# Altium PCB Detection_Circuit_PCB.PcbDoc
Units mil, origin at the board's own origin, x right, y up, seen from the top; angles counter-clockwise.
Board outline 6000 x 2000 mil, 2 copper layers (TOP, BOTTOM), stack 54 mil thick; 173 components, 63 nets, 342 pads, 41 vias.
Unrouted connection lines stored in the file: 3.
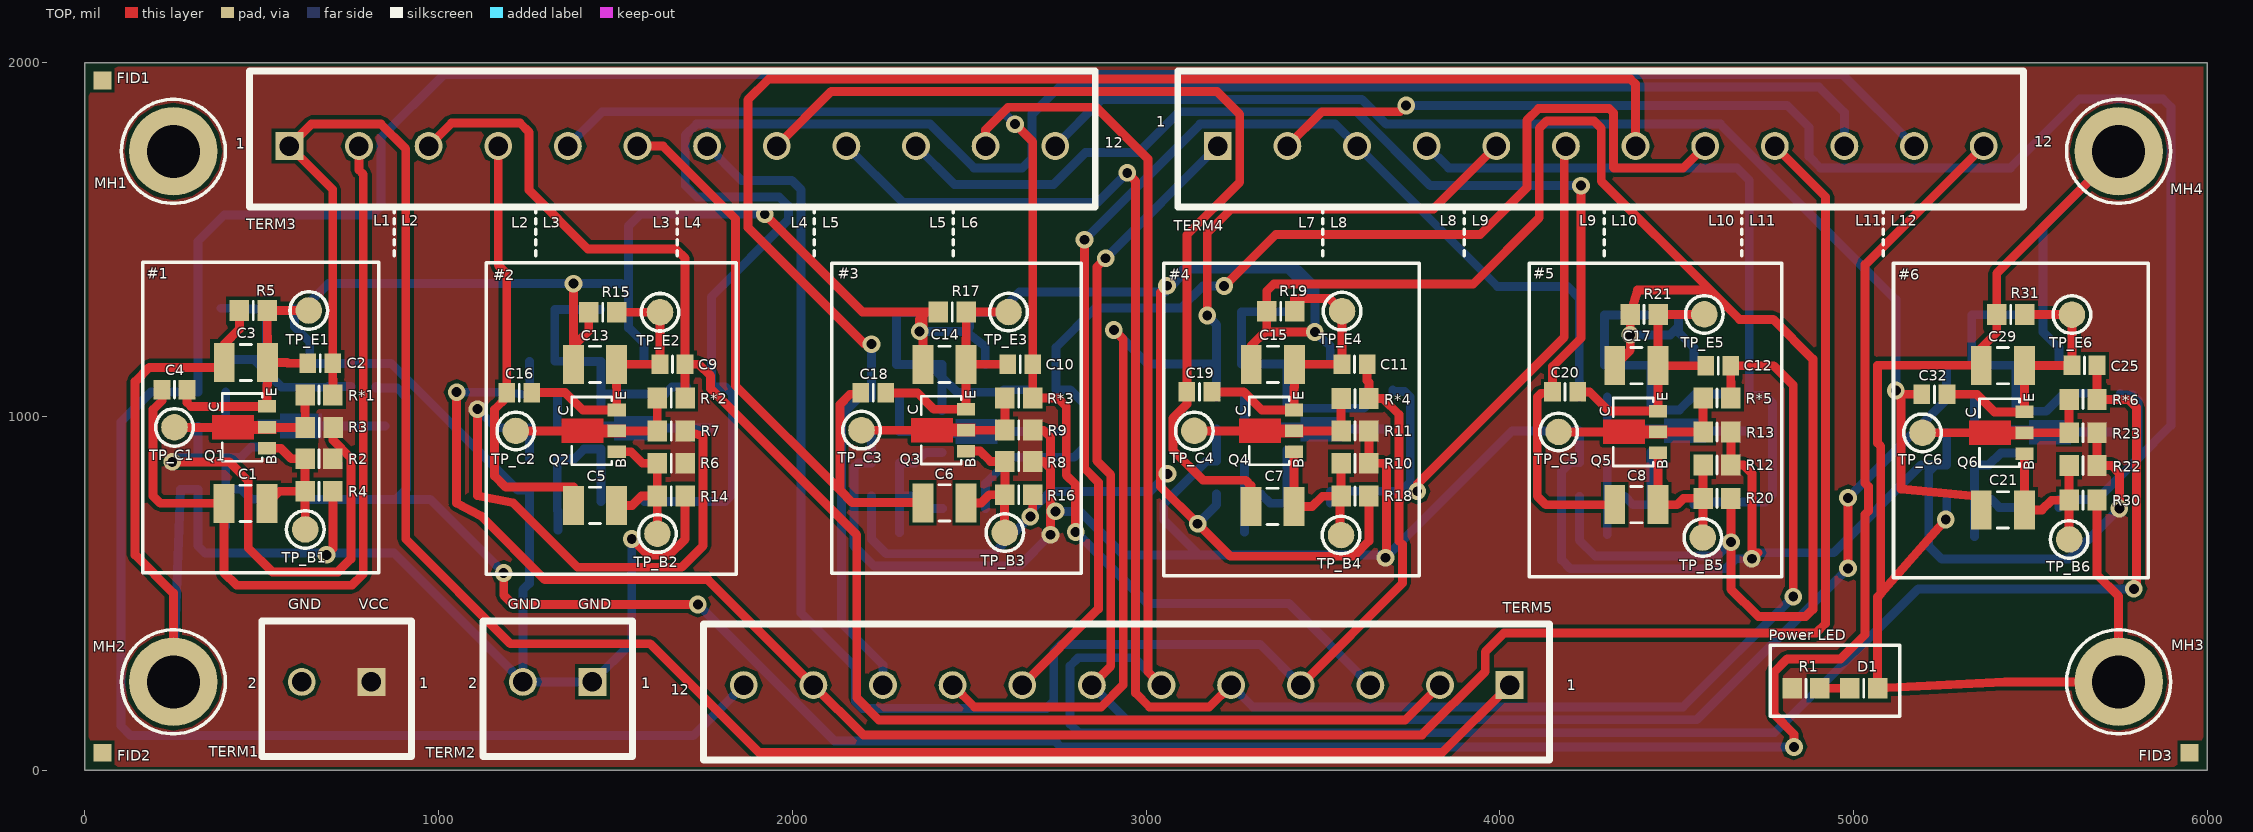
[diagram p0: TOP view]
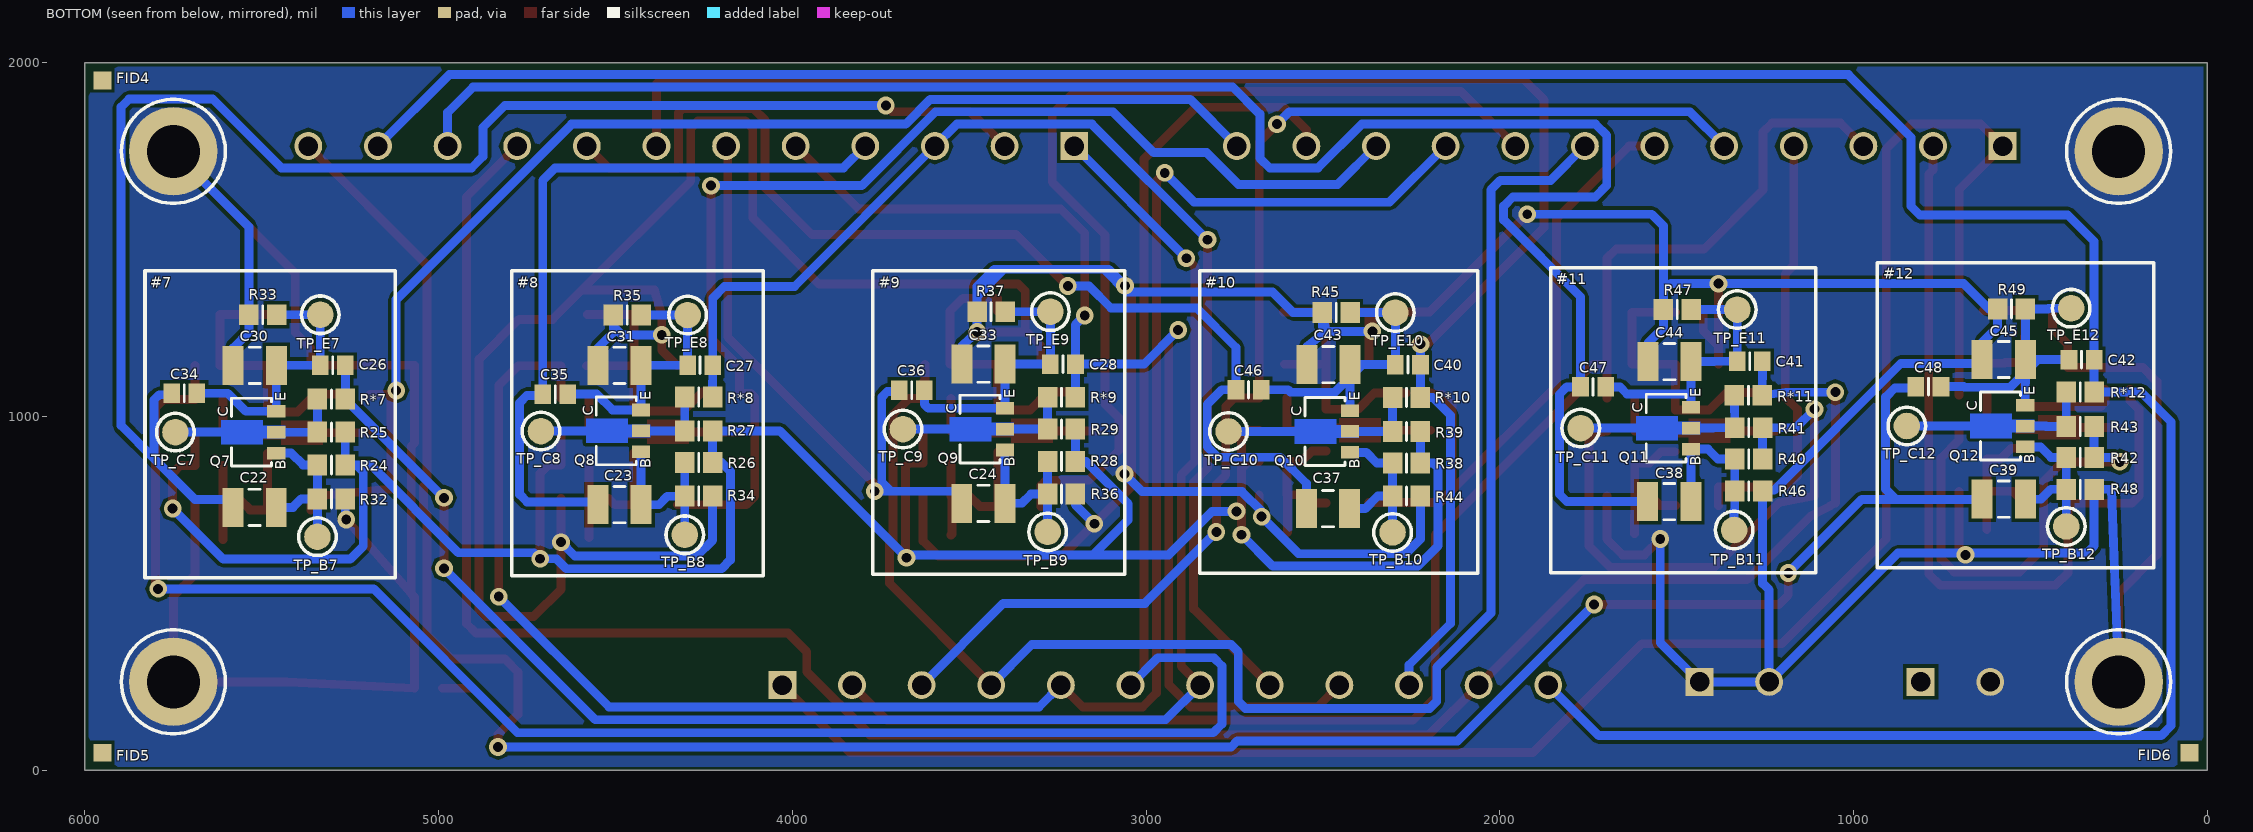
[diagram p1: BOTTOM view, seen from below]

## Layer stack, top to bottom
Top Solder: solder mask 4, Solder Resist, Dk 3.5
TOP: signal copper 20
Dielectric 1: dielectric 14, FR-4, Dk 4.8
BOTTOM: signal copper 20
Bottom Solder: solder mask 4, Solder Resist, Dk 3.5

## Board outline
0,0 6000,0 6000,2000 0,2000

## Design rules (kind name [scope] priority, off if disabled: settings)
BoardOutlineClearance [All] p1: gap=10
Clearance [All] p1: gap=10
HoleSize [All] p1: absolutevalues=TRUE maxlimit=500 minlimit=1 maxpercent=80.000 minpercent=20.000
MinimumSolderMaskSliver [All] p1: minsoldermaskwidth=5
PlaneConnect [All] p1: planeconnectstyle=Direct reliefexpansion=20 reliefentries=4 reliefconductorwidth=10 reliefairgap=10
PolygonConnect [All] p1: connectstyle=Direct reliefconductorwidth=10 reliefentries=4 polygonreliefangle="90 Angle" airgapwidth=10
RoutingVias VCC_Vias [InNet('VCC')] p1: holewidth=28 width=50 viastyle="Through Hole" minholewidth=28 minwidth=50 maxholewidth=28 maxwidth=50
RoutingVias GND_Vias [InNet('GND')] p2: holewidth=28 width=50 viastyle="Through Hole" minholewidth=28 minwidth=50 maxholewidth=28 maxwidth=50
RoutingVias Default_Vias [InNetClass('Default_Class')] p3: holewidth=28 width=50 viastyle="Through Hole" minholewidth=28 minwidth=50 maxholewidth=28 maxwidth=50
SilkToSilkClearance [All] p1: silktosilkclearance=5
SilkToSolderMaskClearance [IsPad] p1: minsilkscreentomaskgap=5 clearancetoexposedcopper=TRUE
SolderMaskExpansion [All] p1: expansion=4
Width VCC_Width [InNet('VCC')] p1: maxlimit=25 minlimit=25 preferedwidth=25
Width GND_Width [InNet('GND')] p2: maxlimit=25 minlimit=25 preferedwidth=25
Width Default_Width [InNetClass('Default_Class')] p3: maxlimit=25 minlimit=25 preferedwidth=25
25 further rules are at their usual default settings.

## Classes and differential pairs
net class Default_Class: BASE_1 BASE_2 BASE_3 BASE_4 BASE_5 BASE_6 BASE_7 BASE_8 BASE_9 BASE_10 BASE_11 BASE_12 COLLECTOR_1 COLLECTOR_2 COLLECTOR_3 COLLECTOR_4 COLLECTOR_5 COLLECTOR_6 COLLECTOR_7 COLLECTOR_8 COLLECTOR_9 COLLECTOR_10 COLLECTOR_11 COLLECTOR_12 EMITTER_1 EMITTER_2 EMITTER_3 EMITTER_4 EMITTER_5 EMITTER_6 EMITTER_7 EMITTER_8 EMITTER_9 EMITTER_10 EMITTER_11 EMITTER_12 FEEDBACK_1 FEEDBACK_2 FEEDBACK_3 FEEDBACK_4 FEEDBACK_5 FEEDBACK_6 FEEDBACK_7 FEEDBACK_8 FEEDBACK_9 FEEDBACK_10 FEEDBACK_11 FEEDBACK_12 MCU_1 MCU_2 MCU_3 MCU_4 MCU_5 MCU_6 MCU_7 MCU_8 MCU_9 MCU_10 MCU_11 MCU_12 NetD1_1
component class Detection_Circuit_Sheet_02: C5 C6 C7 C8 C9 C10 C11 C12 C13 C14 C15 C16 C17 C18 C19 C20 C21 C22 C23 C24 C25 C26 C27 C28 C29 C30 C31 C32 C33 C34 C35 C36 C37 C38 C39 C40 C41 C42 C43 C44 C45 C46 C47 C48 Q2 Q3 Q4 Q5 Q6 Q7 Q8 Q9 Q10 Q11 Q12 R6 R7 R8 R9 R10 R11 R12 R13 R14 R15 R16 R17 R18 R19 R20 R21 R22 R23 R24 R25 R26 R27 R28 R29 R30 R31 R32 R33 R34 R35 R36 R37 R38 R39 R40 R41 R42 R43 R44 R45 R46 R47 R48 R49 R*2 R*3 R*4 R*5 R*6 R*7 R*8 R*9 R*10 R*11 R*12 TERM3 TERM4 TERM5 TP_B2 TP_B3 TP_B4 TP_B5 TP_B6 TP_B7 TP_B8 TP_B9 TP_B10 TP_B11 TP_B12 TP_C2 TP_C3 TP_C4 TP_C5 TP_C6 TP_C7 TP_C8 TP_C9 TP_C10 TP_C11 TP_C12 TP_E2 TP_E3 TP_E4 TP_E5 TP_E6 TP_E7 TP_E8 TP_E9 TP_E10 TP_E11 TP_E12
component class Detection_Circuit_Sheet_01: C1 C2 C3 C4 D1 FID1 FID2 FID3 FID4 FID5 FID6 HEX_NUT1 MH1 MH2 MH3 MH4 Q1 R1 R2 R3 R4 R5 R*1 Screw1 StandOff1 StandOff2 StandOff3 StandOff4 TERM1 TERM2 TP_B1 TP_C1 TP_E1 Washer1 Washer2 Washer3 Washer4 Washer5 Washer6 Washer7 Washer8

## Components (designator, comment, footprint, x,y, rotation, side; value= is the part's Value field where it differs from the comment)
C1 "100UF" C1210_M 454,755 r0 top
C2 "08055C224JAT2A" 6-0805_N 665.34,1151 r0 top
C3 "100UF" C1210_M 455,1153 r0 top
C4 "08055C224JAT2A" 6-0805_N 253.28,1076.59 r0 top
C5 "100UF" C1210_M 1442.37,749 r0 top
C6 "100UF" C1210_M 2430.39,756 r0 top
C7 "100UF" C1210_M 3357.74,746 r0 top
C8 "100UF" C1210_M 4386.37,751 r0 top
C9 "08055C224JAT2A" 6-0805_N 1661.37,1148 r0 top
C10 "08055C224JAT2A" 6-0805_N 2644.39,1148 r0 top
C11 "08055C224JAT2A" 6-0805_N 3589.74,1148 r0 top
C12 "08055C224JAT2A" 6-0805_N 4617.8,1144 r0 top
C13 "100UF" C1210_M 1442.37,1148 r0 top
C14 "100UF" C1210_M 2430.39,1148 r0 top
C15 "100UF" C1210_M 3358.74,1148 r0 top
C16 "08055C224JAT2A" 6-0805_N 1228,1068 r0 top
C17 "100UF" C1210_M 4386.37,1144 r0 top
C18 "08055C224JAT2A" 6-0805_N 2229,1067 r0 top
C19 "08055C224JAT2A" 6-0805_N 3151,1070 r0 top
C20 "08055C224JAT2A" 6-0805_N 4185,1070 r0 top
C21 "100UF" C1210_M 5422.65,736.28 r0 top
C22 "100UF" C1210_M 5520.11,743.4 r180 bottom
C23 "100UF" C1210_M 4488.57,751 r180 bottom
C24 "100UF" C1210_M 3460,755 r180 bottom
C25 "08055C224JAT2A" 6-0805_N 5653.37,1144.69 r0 top
C26 "08055C224JAT2A" 6-0805_N 5299.11,1145 r180 bottom
C27 "08055C224JAT2A" 6-0805_N 4260.57,1145.38 r180 bottom
C28 "08055C224JAT2A" 6-0805_N 3235,1148.6 r180 bottom
C29 "100UF" C1210_M 5422.65,1144.28 r0 top
C30 "100UF" C1210_M 5519.83,1145 r180 bottom
C31 "100UF" C1210_M 4488.57,1145 r180 bottom
C32 "08055C224JAT2A" 6-0805_N 5229,1063 r0 top
C33 "100UF" C1210_M 3459.72,1148.6 r180 bottom
C34 "08055C224JAT2A" 6-0805_N 5719,1066 r180 bottom
C35 "08055C224JAT2A" 6-0805_N 4670.28,1063.6 r180 bottom
C36 "08055C224JAT2A" 6-0805_N 3662,1075 r180 bottom
C37 "100UF" C1210_M 2485.31,740 r180 bottom
C38 "100UF" C1210_M 1520.57,759.4 r180 bottom
C39 "100UF" C1210_M 574.88,766.4 r180 bottom
C40 "08055C224JAT2A" 6-0805_N 2259.6,1147 r180 bottom
C41 "08055C224JAT2A" 6-0805_N 1292.88,1156.4 r180 bottom
C42 "08055C224JAT2A" 6-0805_N 354.88,1161.4 r180 bottom
C43 "100UF" C1210_M 2484.31,1147 r180 bottom
C44 "100UF" C1210_M 1519.88,1155.4 r180 bottom
C45 "100UF" C1210_M 574.88,1161.4 r180 bottom
C46 "08055C224JAT2A" 6-0805_N 2710,1076 r180 bottom
C47 "08055C224JAT2A" 6-0805_N 1736,1084 r180 bottom
C48 "08055C224JAT2A" 6-0805_N 788,1085 r180 bottom
D1 "LTST-C171GKT" 6-0805_M 5029,232 r0 top
FID1 "Fiducial" Fiducial#1 52,1951 r90 top
FID2 "Fiducial" Fiducial#2 -246,158 r90 top
FID3 "Fiducial" Fiducial#3 5953,55 r90 top
FID4 "Fiducial" Fiducial#4 5948,1950 r90 bottom
FID5 "Fiducial" Fiducial#5 5969,99 r90 bottom
FID6 "Fiducial" Fiducial#6 -110,51 r90 bottom
MH1 "#6 MH" #6_MH 250,1750 r0 top locked
MH2 "#6 MH" #6_MH 250,250 r0 top locked
MH3 "#6 MH" #6_MH 5750,250 r0 top locked
MH4 "#6 MH" #6_MH 5750,1750 r0 top locked
Q1 "DXT3904" DXT3904-13 445.28,969.6 r90 top
Q2 "DXT3904" DXT3904-13 1433.65,959.6 r90 top
Q3 "DXT3904" DXT3904-13 2421.68,961.6 r90 top
Q4 "DXT3904" DXT3904-13 3349.02,959.6 r90 top
Q5 "DXT3904" DXT3904-13 4377.96,956.69 r90 top
Q6 "DXT3904" DXT3904-13 5413.65,954.28 r90 top
Q7 "DXT3904" DXT3904-13 5528.83,956 r90 bottom
Q8 "DXT3904" DXT3904-13 4497.28,959.6 r90 bottom
Q9 "DXT3904" DXT3904-13 3468.72,964.6 r90 bottom
Q10 "DXT3904" DXT3904-13 2493.31,958 r90 bottom
Q11 "DXT3904" DXT3904-13 1528.88,967.4 r90 bottom
Q12 "DXT3904" DXT3904-13 583.88,973.4 r90 bottom
R1 "1K" 6-0805_M 4866,232 r180 top
R2 "39K" 6-0805_M 662,881 r0 top
R3 "2.2K" 6-0805_M 662.28,969.54 r0 top
R4 "10K" 6-0805_M 662,789 r180 top
R5 "470" 6-0805_M 476,1300 r0 top
R6 "39K" 6-0805_M 1657.65,868 r0 top
R7 "2.2K" 6-0805_M 1657.65,959.54 r0 top
R8 "39K" 6-0805_M 2640.39,873 r0 top
R9 "2.2K" 6-0805_M 2640.39,961.6 r0 top
R10 "39K" 6-0805_M 3590.74,868 r0 top
R11 "2.2K" 6-0805_M 3590.74,959.6 r0 top
R12 "39K" 6-0805_M 4614.37,863 r0 top
R13 "2.2K" 6-0805_M 4614.37,956.64 r0 top
R14 "10K" 6-0805_M 1657.65,776 r180 top
R15 "470" 6-0805_M 1464.02,1295 r0 top
R16 "10K" 6-0805_M 2640.39,779 r180 top
R17 "470" 6-0805_M 2452.39,1296 r0 top
R18 "10K" 6-0805_M 3590.74,775 r180 top
R19 "470" 6-0805_M 3380.72,1298 r0 top
R20 "10K" 6-0805_M 4614.37,769 r180 top
R21 "470" 6-0805_M 4408.37,1289 r0 top
R22 "39K" 6-0805_M 5649.37,861.69 r0 top
R23 "2.2K" 6-0805_M 5649.37,954.23 r0 top
R24 "39K" 6-0805_M 5303.11,863.4 r180 bottom
R25 "2.2K" 6-0805_M 5303.11,955.94 r180 bottom
R26 "39K" 6-0805_M 4264.57,870 r180 bottom
R27 "2.2K" 6-0805_M 4264.57,959.54 r180 bottom
R28 "39K" 6-0805_M 3238.72,873.6 r180 bottom
R29 "2.2K" 6-0805_M 3238.72,964.54 r180 bottom
R30 "10K" 6-0805_M 5649.37,763.69 r180 top
R31 "470" 6-0805_M 5444.65,1288.28 r0 top
R32 "10K" 6-0805_M 5303.11,767.4 r0 bottom
R33 "470" 6-0805_M 5497.13,1288 r180 bottom
R34 "10K" 6-0805_M 4264.57,775 r0 bottom
R35 "470" 6-0805_M 4466.57,1287 r180 bottom
R36 "10K" 6-0805_M 3239,781 r0 bottom
R37 "470" 6-0805_M 3438,1296.6 r180 bottom
R38 "39K" 6-0805_M 2263.6,868.4 r180 bottom
R39 "2.2K" 6-0805_M 2263.6,958 r180 bottom
R40 "39K" 6-0805_M 1296,880 r180 bottom
R41 "2.2K" 6-0805_M 1295.88,968.4 r180 bottom
R42 "39K" 6-0805_M 358.88,884.4 r180 bottom
R43 "2.2K" 6-0805_M 358.88,972.5 r180 bottom
R44 "10K" 6-0805_M 2263.6,775.4 r0 bottom
R45 "470" 6-0805_M 2462.31,1294 r180 bottom
R46 "10K" 6-0805_M 1296,790 r0 bottom
R47 "470" 6-0805_M 1497.88,1302.4 r180 bottom
R48 "10K" 6-0805_M 358.88,794.4 r0 bottom
R49 "470" 6-0805_M 552.88,1304.59 r180 bottom
R*1 "0" 6-0805_M 662,1061 r0 top
R*2 "0" 6-0805_M 1657.65,1053 r0 top
R*3 "0" 6-0805_M 2640.39,1053 r0 top
R*4 "0" 6-0805_M 3590.74,1051 r0 top
R*5 "0" 6-0805_M 4614.37,1052.69 r0 top
R*6 "0" 6-0805_M 5649.37,1048.69 r0 top
R*7 "0" 6-0805_M 5303.11,1049.4 r180 bottom
R*8 "0" 6-0805_M 4264.57,1055 r180 bottom
R*9 "0" 6-0805_M 3238.72,1054.6 r180 bottom
R*10 "0" 6-0805_M 2263.6,1054.4 r180 bottom
R*11 "0" 6-0805_M 1296.88,1060.4 r180 bottom
R*12 "0" 6-0805_M 358.88,1069.4 r180 bottom
TERM1 "1935161" 1935161 810,250 r0 top
TERM2 "1935161" 1935161 1435,250 r0 top
TERM3 "1935268" 1935268 578,1765 r180 top locked
TERM4 "1935268" 1935268 3203,1765 r180 top locked
TERM5 "1935268" 1935268 4028,241 r0 top locked
TP_B1 "TestPoint" TestPoint 623,681 r90 top
TP_B2 "TestPoint" TestPoint 1618.68,669 r90 top
TP_B3 "TestPoint" TestPoint 2601.02,672 r90 top
TP_B4 "TestPoint" TestPoint 3551.37,665 r90 top
TP_B5 "TestPoint" TestPoint 4574.37,658 r90 top
TP_B6 "TestPoint" TestPoint 5610,652.69 r90 top
TP_B7 "TestPoint" TestPoint 5342.48,660.4 r90 bottom
TP_B8 "TestPoint" TestPoint 4303.94,666 r90 bottom
TP_B9 "TestPoint" TestPoint 3278.09,674 r90 bottom
TP_B10 "TestPoint" TestPoint 2302.88,672.4 r90 bottom
TP_B11 "TestPoint" TestPoint 1337.25,679.4 r90 bottom
TP_B12 "TestPoint" TestPoint 398.25,689.4 r90 bottom
TP_C1 "TestPoint" TestPoint 253.28,969.6 r90 top
TP_C2 "TestPoint" TestPoint 1218.37,959.54 r90 top
TP_C3 "TestPoint" TestPoint 2195.68,961.6 r90 top
TP_C4 "TestPoint" TestPoint 3136.74,959.6 r90 top
TP_C5 "TestPoint" TestPoint 4166.37,956.64 r90 top
TP_C6 "TestPoint" TestPoint 5195.37,954.23 r90 top
TP_C7 "TestPoint" TestPoint 5744.11,956 r90 bottom
TP_C8 "TestPoint" TestPoint 4710.57,959 r90 bottom
TP_C9 "TestPoint" TestPoint 3687,964.54 r90 bottom
TP_C10 "TestPoint" TestPoint 2766.6,958 r90 bottom
TP_C11 "TestPoint" TestPoint 1770.88,967.4 r90 bottom
TP_C12 "TestPoint" TestPoint 848.88,973.4 r90 bottom
TP_E1 "TestPoint" TestPoint 633,1300 r90 top
TP_E2 "TestPoint" TestPoint 1625.94,1295 r90 top
TP_E3 "TestPoint" TestPoint 2611.39,1295.6 r90 top
TP_E4 "TestPoint" TestPoint 3554.31,1298 r90 top
TP_E5 "TestPoint" TestPoint 4578.71,1289 r90 top
TP_E6 "TestPoint" TestPoint 5617.94,1288.28 r90 top
TP_E7 "TestPoint" TestPoint 5334.54,1288 r90 bottom
TP_E8 "TestPoint" TestPoint 4296,1287 r90 bottom
TP_E9 "TestPoint" TestPoint 3270.43,1296.6 r90 bottom
TP_E10 "TestPoint" TestPoint 2295.03,1294 r90 bottom
TP_E11 "TestPoint" TestPoint 1328.31,1302.4 r90 bottom
TP_E12 "TestPoint" TestPoint 384.31,1306.4 r90 bottom

## Footprints (in the part's own frame and the unit in brackets; to place one, negate y for a bottom-side part, rotate by r counter-clockwise, add the part's x,y. Pads: shape width x height; smd on the part's side, far side on the other; paste and mask are expansions set on the pad)
6-0805_M [mm] "Chip Resistor, Body 2.0x1.2mm, IPC Low Density"
  rect 1.4x1.5 smd: 1(-1,0) 2(1,0)
  silkscreen extent 0,-0.65 0,0.65, body extent -1.07,-0.7 1.07,0.7, height 0.7
6-0805_N [mm] "Chip Resistor, Body 2.0x1.2mm, IPC Medium Density"
  rect 1.2x1.4 smd: 1(-0.9,0) 2(0.9,0)
  silkscreen extent 0,-0.6 0,0.6, body extent -1.07,-0.7 1.07,0.7, height 0.7
1935161 [mm] "TERM BLOCK PCB 2POS 5.0MM GREEN"
  rect 2x2 hole 1.4: 1(0,0)
  round 2 hole 1.4: 2(-5,0)
  silkscreen extent -7.88,-5.37 2.88,4.37, body extent -7.5,-5 2.5,4, height 11.4
1935268 [mm] "TERM BLOCK PCB 12POS 5.0MM GREEN"
  rect 2x2 hole 1.4: 1(0,0)
  round 2 hole 1.4: 2(-5,0) 3(-10,0) 4(-15,0) 5(-20,0) 6(-25,0) 7(-30,0) 8(-35,0) 9(-40,0) 10(-45,0) 11(-50,0) 12(-55,0)
  silkscreen extent -57.88,-5.37 2.87,4.37, body extent -57.5,-5 2.5,4, height 11.4
#6_MH [mil] "#6 Mounting Hole w/ 6-32 Hex Stand Off Clearance"
  round 250 hole 150: MH(0,0)
  silkscreen extent -147,-147 147,147
C1210_M [mm] "Chip Capacitor, Body 3.2x2.5mm, IPC Low Density"
  rect 1.5x2.8 smd: 1(-1.55,0) 2(1.55,0)
  silkscreen extent -0.4,-1.3 0.4,1.3, body extent -1.7,-1.35 1.7,1.35, height 1.5
DXT3904-13 [mm] "TRANS NPN 40V 0.2A SOT89-3"
  rect 0.9x1.3 smd: 1(-0.001,-1.775) 2(-1.5,-1.775) 3(1.5,-1.775)
  TOP region: -0.866,-0.805 -0.45,-0.805 -0.45,-2.425 0.45,-2.425 0.45,-0.805 0.866,-0.805 0.866,2.175 -0.866,2.175
  silkscreen extent -2.44,-1.42 2.44,1.45, body extent -2.3,-1.3 2.3,1.3, height 1.6
Fiducial#1 [mil] "25 MIL FIDUCIAL"
  rect 50x50 smd mask+0: 1(-1,2)
Fiducial#2 [mil] "25 MIL FIDUCIAL"
  rect 50x50 smd mask+0: 1(-108,-296)
Fiducial#3 [mil] "25 MIL FIDUCIAL"
  rect 50x50 smd mask+0: 1(-5,3)
Fiducial#4 [mil] "25 MIL FIDUCIAL"
  rect 50x50 smd mask+0: 1(0,2)
Fiducial#5 [mil] "25 MIL FIDUCIAL"
  rect 50x50 smd mask+0: 1(-49,-19)
Fiducial#6 [mil] "25 MIL FIDUCIAL"
  rect 50x50 smd mask+0: 1(-1,160)
TestPoint [mil] "TestPoint"
  round 75 smd mask+10: 1(0,0)
  silkscreen extent -53,-53 53,53

## Part data
C1 C3 C5 C6 C7 C8 C13 C14 C15 C17 C21 C22 C23 C24 C29 C30 C31 C33 C37 C38 C39 C43 C44 C45: library part CC1210MKX5R7BB107, "CAP CER 100UF 16V X5R 1210"
C2 C4 C9 C10 C11 C12 C16 C18 C19 C20 C25 C26 C27 C28 C32 C34 C35 C36 C40 C41 C42 C46 C47 C48: "CAP CER 0.22UF 50V X7R 0805"
D1: library part LED3, "LED GREEN CLEAR 0805 SMD"
MH1 MH2 MH3 MH4: library part MH, "#6 Mounting Hole"
Q1 Q2 Q3 Q4 Q5 Q6 Q7 Q8 Q9 Q10 Q11 Q12: library part DXT3904-13, "TRANS NPN 40V 0.2A SOT89-3"
R1: library part RNCP0805FTD1K00, "RES SMD 1K OHM 1% 1/4W 0805"
R2 R6 R8 R10 R12 R22 R24 R26 R28 R38 R40 R42: library part ERJ-PB6D3902V, "RES SMD 39K OHM 0.5% 1/4W 0805"
R3 R7 R9 R11 R13 R23 R25 R27 R29 R39 R41 R43: library part ERJ-PB6D2201V, "RES SMD 2.2K OHM 0.5% 1/4W 0805"
R4 R14 R16 R18 R20 R30 R32 R34 R36 R44 R46 R48: library part RNCP0805FTD10K0, "RES SMD 10K OHM 1% 1/4W 0805"
R5 R15 R17 R19 R21 R31 R33 R35 R37 R45 R47 R49: library part ERJ-PB6D4700V, "RES SMD 470 OHM 0.5% 1/4W 0805"
R*1 R*2 R*3 R*4 R*5 R*6 R*7 R*8 R*9 R*10 R*11 R*12: library part ERJ-6GEY0R00V, "RES SMD 0 OHM JUMPER 1/8W 0805"
TERM1 TERM2: "TERM BLOCK PCB 2POS 5.0MM GREEN"
TERM3 TERM4 TERM5: "TERM BLOCK PCB 12POS 5.0MM GREEN"
TP_B1 TP_B2 TP_B3 TP_B4 TP_B5 TP_B6 TP_B7 TP_B8 TP_B9 TP_B10 TP_B11 TP_B12 TP_C1 TP_C2 TP_C3 TP_C4 TP_C5 TP_C6 TP_C7 TP_C8 TP_C9 TP_C10 TP_C11 TP_C12 TP_E1 TP_E2 TP_E3 TP_E4 TP_E5 TP_E6 TP_E7 TP_E8 TP_E9 TP_E10 TP_E11 TP_E12: "Test Point"

## Via types
v1: diameter 50, hole 28, TOP to BOTTOM, 41 vias

## Nets (pads, with @x,y where several pads share a name; then routed paths per layer and width w, separated by ;. In a path a pad name is that pad's centre, name@x,y a point inside that pad or via, vN(x,y) a via of type N, cw(c..) or ccw(c..) an arc to the next point about the centre after c; other vN are vias at no path point)
BASE_1: C1.2 Q1.2 R2.1 R4.2 TP_B1.1 | length 441.5
  TOP w25: C1.2 549.02,789 R4.2 ; Q1.2 554,910.54 583.54,881 R2.1 R4.2 ; TP_B1.1 623,734 622.63,734.37 R4.2
BASE_2: C5.2 Q2.2 R6.1 R14.2 TP_B2.1 | length 453.5
  TOP w25: C5.2 1547,749 1574,776 R14.2 ; Q2.2 1544,900.54 1576.54,868 R6.1 R14.2 ; TP_B2.1 1618.68,722 1618.28,722.39 R14.2
BASE_3: C6.2 Q3.2 R8.1 R16.2 TP_B3.1 | length 442.2
  TOP w25: C6.2 2534,756 2557,779 R16.2@2600.08,779 ; Q3.2 2531,902.54 2560.54,873 R8.1 R16.2 R16.2@2600.08,779 ; TP_B3.1 2600.08,672.95 R16.2@2600.08,779
BASE_4: C7.2 Q4.2 R10.1 R18.2 TP_B4.1 | length 503.4
  TOP w25: Q4.2 3418.91,823.14 3418.76,823 C7.2 3470,746 3499,775 R18.2@3548.52,775 ; TP_B4.1 3548.52,667.85 R18.2@3548.52,775 ; R10.1 R18.2 R18.2@3548.52,775
BASE_5: C8.2 Q5.2 R12.1 R20.2 TP_B5.1 | length 487.1
  TOP w25: Q5.2 4447.84,824.45 4447.39,824 C8.2 4502,751 4520,769 R20.2 ; TP_B5.1 4574.37,713 4575,713.63 R20.2 ; R12.1 R20.2
BASE_6: C21.2 Q6.2 R22.1 R30.2 TP_B6.1 | length 505.7
  TOP w25: Q6.2 5483.54,815.14 5483.68,815 C21.2 5533,736.28 5560.4,763.69 R30.2 ; TP_B6.1 R30.2 ; R22.1 R30.2
BASE_7: C22.2 Q7.2 R24.1 R32.2 TP_B7.1 | length 459.9
  BOTTOM w25: TP_B7.1 R32.2 ; Q7.2 5416.54,896.94 5383,863.4 R24.1 R32.2 ; C22.2 5412,743.4 5388,767.4 R32.2
BASE_8: C23.2 Q8.2 R26.1 R34.2 TP_B8.1 | length 487.1
  BOTTOM w25: TP_B8.1 R34.2 ; R26.1 R34.2 ; Q8.2 4427.4,825.14 4427.54,825 C23.2 4377,751 4353,775 R34.2
BASE_9: C24.2 Q9.2 R28.1 R36.2 TP_B9.1 | length 481.8
  BOTTOM w25: TP_B9.1 3278.09,727 3278.37,727.28 R36.2 ; R28.1 3278.09,827.28 3278.37,827 R36.2 ; Q9.2 3398.83,830.14 3398.98,830 C24.2 3351,755 3325,781 R36.2
BASE_10: C37.2 Q10.2 R38.1 R44.2 TP_B10.1 | length 465.1
  BOTTOM w25: TP_B10.1 2302.88,723 2302.97,723.09 R44.2 ; Q10.2 2377.54,898.95 2347,868.4 R38.1 R44.2 ; C37.2 2380.4,740 2345,775.4 R44.2
BASE_11: C38.2 Q11.2 R40.1 R46.2 TP_B11.1 | length 485.9
  BOTTOM w25: TP_B11.1 1337.25,733 1335.37,734.88 R46.2 R40.1 1383,880 1411.35,908.35 Q11.2 1459,833.55 1459.55,833 C38.2
BASE_12: C39.2 Q12.2 R42.1 R48.2 TP_B12.1 | length 450.4
  BOTTOM w25: TP_B12.1 R48.2 ; C39.2 470,766.4 442,794.4 R48.2 ; Q12.2 470.94,914.35 441,884.4 R42.1 R48.2
COLLECTOR_1: Q1.1 R3.1 R*1.1 TP_C1.1 | length 461.2
  TOP w25: TP_C1.1 384,969.6 384.05,969.54 Q1.1 R3.1 622.91,1015 622.63,1015.28 R*1.1
COLLECTOR_2: Q2.1 R7.1 R*2.1 TP_C2.1 | length 493.4
  TOP w25: TP_C2.1 Q2.1 R7.1 R*2.1
COLLECTOR_3: Q3.1 R9.1 R*3.1 TP_C3.1 | length 496.8
  TOP w25: TP_C3.1 2343,961.6 2343.05,961.54 Q3.1 2546,961.54 2546.05,961.6 R9.1 R*3.1
COLLECTOR_4: Q4.1 R11.1 R*4.1 TP_C4.1 | length 506.1
  TOP w25: TP_C4.1 3277,959.6 3277.05,959.54 Q4.1 3485,959.54 3485.05,959.6 R11.1 R*4.1
COLLECTOR_5: Q5.1 R13.1 R*5.1 TP_C5.1 | length 504.7
  TOP w25: TP_C5.1 Q5.1 R13.1 R*5.1
COLLECTOR_6: Q6.1 R23.1 R*6.1 TP_C6.1 | length 509.1
  TOP w25: TP_C6.1 Q6.1 R23.1 R*6.1
COLLECTOR_7: Q7.1 R25.1 R*7.1 TP_C7.1 | length 495.1
  BOTTOM w25: R*7.1 R25.1 Q7.1 5601,955.94 5601.06,956 TP_C7.1
COLLECTOR_8: Q8.1 R27.1 R*8.1 TP_C8.1 | length 502.3
  BOTTOM w25: R*8.1 R27.1 Q8.1 4568,959.54 4568.54,959 TP_C8.1
COLLECTOR_9: Q9.1 R29.1 R*9.1 TP_C9.1 | length 499
  BOTTOM w25: R*9.1 R29.1 Q9.1 TP_C9.1
COLLECTOR_10: Q10.1 R39.1 R*10.1 TP_C10.1 | length 560.1
  BOTTOM w25: R*10.1 R39.1 2363,958 2363.05,957.95 Q10.1 2594,957.95 2594.05,958 TP_C10.1
COLLECTOR_11: Q11.1 R41.1 R*11.1 TP_C11.1 | length 528.5
  BOTTOM w25: R*11.1 1336.25,1014 1335.25,1013 R41.1 1396,968.4 1397.06,967.35 Q11.1 1614,967.35 1614.06,967.4 TP_C11.1
COLLECTOR_12: Q12.1 R43.1 R*12.1 TP_C12.1 | length 547.9
  BOTTOM w25: R*12.1 R43.1 455,972.5 455.85,973.35 Q12.1 681,973.35 681.06,973.4 TP_C12.1
EMITTER_1: C2.1 C3.2 C4.2 Q1.3 R5.2 TP_E1.1 | length 772.1
  TOP w25: C4.2 288.72,1039.94 300,1028.65 Q1.3 515.17,1090 516.02,1090.86 C3.2 ; C2.1 573,1151 571,1153 C3.2 ; TP_E1.1 R5.2 515.37,1226.65 516.02,1226 C3.2
EMITTER_2: C9.1 C13.2 C16.2 Q2.3 R15.2 TP_E2.1 | length 782
  TOP w25: C16.2 1358,1068 1407.35,1018.65 Q2.3 1503.54,1083 1503.39,1083.14 C13.2 C9.1 TP_E2.1 R15.2
EMITTER_3: C10.1 C14.2 C18.2 Q3.3 R17.2 TP_E3.1 | length 759.2
  TOP w25: C18.2 2354,1067 2400.35,1020.65 Q3.3 2491.56,1084 2491.42,1084.14 C14.2 ; C10.1 C14.2 ; TP_E3.1 2551.4,1295.6 2551,1296 R17.2 2491.76,1221.35 2491.42,1221 C14.2
EMITTER_4: C11.1 C15.2 C19.2 Q4.3 R19.2 TP_E4.1 | length 853.6
  TOP w25: C19.2 3276,1070 3327.35,1018.65 Q4.3 3418.91,1082 3419.76,1082.86 C15.2 C11.1 TP_E4.1 3518,1334.31 3420.09,1334.31 R19.2
EMITTER_5: C12.1 C17.2 C20.2 Q5.3 R21.2 TP_E5.1 | length 789.4
  TOP w25: C20.2 4254,1070 4308.25,1015.75 Q5.3 4447.84,1079 4447.39,1079.45 C17.2 ; TP_E5.1 R21.2 4447.74,1216.35 4447.39,1216 C17.2 ; C12.1 C17.2
EMITTER_6: C25.1 C29.2 C32.2 Q6.3 R31.2 TP_E6.1 | length 782.6
  TOP w25: C32.2 5349,1063 5398.66,1013.34 Q6.3 5483.54,1078 5483.68,1078.14 C29.2 5550,1144.28 5550.4,1144.69 C25.1 TP_E6.1 R31.2
EMITTER_7: C26.1 C30.2 C34.2 Q7.3 R33.2 TP_E7.1 | length 766.2
  BOTTOM w25: R33.2 TP_E7.1 C26.1 C30.2 5458.8,1079.14 5458.95,1079 Q7.3 5545,1015.06 5595.94,1066 C34.2
EMITTER_8: C27.1 C31.2 C35.2 Q8.3 R35.2 TP_E8.1 | length 757
  BOTTOM w25: R35.2 TP_E8.1 C27.1 4361,1145.38 4361.38,1145 C31.2 4427.54,1081.14 4427.4,1081 Q8.3 4508,1018.65 4552.94,1063.6 C35.2
EMITTER_9: C28.1 C33.2 C36.2 Q9.3 R37.2 TP_E9.1 | length 801.9
  BOTTOM w25: R37.2 TP_E9.1 C28.1 C33.2 3398.69,1086.14 3398.83,1086 Q9.3 3615.22,1023.65 3626.57,1035 C36.2
EMITTER_10: C40.1 C43.2 C46.2 Q10.3 R45.2 TP_E10.1 | length 854.9
  BOTTOM w25: R45.2 TP_E10.1 C40.1 2359,1147 2388,1147 ; Q10.3 2423.43,1081 2423.29,1081.14 C43.2@2423.29,1111.71 ; C46.2 2598,1076 2591,1069 2466,1069 C43.2@2423.29,1111.71 ; 2388,1147 C43.2@2423.29,1111.71 ; 2388,1147 C43.2 C43.2@2423.29,1111.71
EMITTER_11: C41.1 C44.2 C47.2 Q11.3 R47.2 TP_E11.1 | length 788.7
  BOTTOM w25: R47.2 TP_E11.1 C41.1 1393,1156.4 1394,1155.4 C44.2 1458.86,1070 ; Q11.3 1458.86,1026.46 1458.86,1070 ; C47.2 1660,1084 1640,1064 1464.86,1064 1458.86,1070
EMITTER_12: C42.1 C45.2 C48.2 Q12.3 R49.2 TP_E12.1 | length 834.1
  BOTTOM w25: TP_E12.1 448,1306.4 449.81,1304.59 R49.2 513.51,1232.35 513.86,1232 C45.2 ; C42.1 452,1161.4 477.6,1161.4 ; Q12.3 514,1096 513.86,1096.14 C45.2@513.86,1125.14 ; C48.2 688,1085 686,1083 556,1083 C45.2@513.86,1125.14 ; 477.6,1161.4 C45.2@513.86,1125.14 ; 477.6,1161.4 C45.2 ; C45.2@513.86,1125.14 C45.2
FEEDBACK_1: C1.1 C4.1 TERM3.2 | length 2353.4
  TOP w25: C4.1 217.85,1044.85 193,1020 193,775 213,755 C1.1 392.98,559.02 429,523 755,523 787,555 787,1685 774.85,1697.15 TERM3.2
FEEDBACK_2: C5.1 C16.1 TERM3.4 | length 1244.9
  TOP w25: TERM3.4 1168.55,1428.02 1192.57,1404 C16.1 1192.57,1054.57 1158,1020 1158,832.5 1190,800.5 1381.35,800.5 C5.1
FEEDBACK_3: C6.1 C18.1 TERM3.6 | length 1819.3
  TOP w25: TERM3.6 1634,1765 1839.5,1559.5 1839.5,1087.5 2135,792 ; C18.1 2193.57,1063 2163,1063 2135,1035 2135,792 ; C6.1 2369.37,757 2170,757 2135,792
FEEDBACK_4: C7.1 C19.1 TERM3.8 | length 2748.9
  TOP w25: TERM3.8 2110.45,1919.5 3200.5,1919.5 3265,1855 3265,1663 3115.57,1513.57 C19.1 3115.57,1035 3076,995.43 3076,905.5 3161.5,820 3281.72,820 3296.72,805 C7.1
FEEDBACK_5: C8.1 C20.1 TERM3.10 | length 3274.6
  TOP w25: v1(4230,1653) 4230,1222 4149.57,1141.57 C20.1 4149.57,1066 4117,1066 4106,1055 4106,775 4130,751 C8.1
  BOTTOM w25: TERM3.10 2458.15,1656.5 2738.83,1656.5 2828.77,1746.44 2978.11,1746.44 3093.55,1861.87 3595.13,1861.87 3804,1653 v1(4230,1653)
FEEDBACK_6: C21.1 C32.1 TERM3.12 | length 3533.3
  TOP w25: v1(5120,1074) 5131,1063 v1@5135,1063 ; C32.1 v1@5135,1063 ; C21.1 5361.63,773.15 5135,795 v1@5135,1063
  BOTTOM w25: TERM3.12 2875.23,1896.87 3609.63,1896.87 3679.5,1827 4623.93,1827 5120,1330.93 v1(5120,1074)
FEEDBACK_7: C22.1 C34.1 TERM4.2 | length 4581
  TOP w25: TERM4.2 3496.85,1862 3718,1862 v1(3735.5,1879.5)
  BOTTOM w25: v1(3735.5,1879.5) 4812.5,1879.5 4874.68,1817.32 4874.68,1735.32 4907,1703 5444,1703 5639,1898 5875,1898 5898,1875 5898,975 5805,882 ; C22.1 C22.1@5581.13,765 ; C34.1 5754.43,1062 5790,1062 5805,1047 5805,882 ; C22.1@5581.13,765 5581.13,765.41 5688.41,765.41 ; C22.1@5581.13,765 5688,765 5688.41,765.41 ; 5688.41,765.41 5688.74,765.41 5805,881.67 5805,882 ; 5688.41,765.41 5805,882
FEEDBACK_8: C23.1 C35.1 TERM4.4 | length 2131.5
  BOTTOM w25: TERM4.4 3855.42,1703.13 4670.72,1703.13 4705.72,1668.13 C35.1 4705.72,1060 4750,1060 4771,1039 4771,780 4750,759 4549.59,759 C23.1
FEEDBACK_9: C24.1 C36.1 TERM4.6 | length 1767
  TOP w25: v1(3767,789) 3767,809 4182.5,1224.5 4182.5,1760.25 TERM4.6
  BOTTOM w25: C24.1 3521.02,789 3721,789 ; C36.1 3697.43,1071 3731,1071 3747,1055 3747,815 3721,789 ; v1(3767,789) 3721,789
FEEDBACK_10: C37.1 C46.1 TERM4.8 | length 3145.5
  TOP w25: v1(3221,1369) 3367,1515 3945,1515 4077,1647 4077,1838 4110,1871 4309.46,1871 4322.23,1858.23 4322.23,1704 4323.23,1703 4518.95,1703 TERM4.8
  BOTTOM w25: C37.1 2546.34,810.84 2620.5,885 2797,885 2827,915 2827,1035 2786,1076 C46.1 2745.43,1195.43 2857,1307 3099,1307 3161,1369 v1(3221,1369)
FEEDBACK_11: C38.1 C47.1 TERM4.10 | length 5301.5
  BOTTOM w25: C38.1 1581.6,760 1810,760 1831,781 1831,1063 1810,1084 C47.1 1771.43,1338.43 1989,1556 1989,1595 1963,1621 1730,1621 1697.23,1653.77 1697.23,1795 1729.1,1826.87 2390,1826.87 2513.87,1703 2650,1703 2678,1731 2678,1855.08 2754.79,1931.87 4902.54,1931.87 4974.65,1859.76 TERM4.10
FEEDBACK_12: C39.1 C48.1 TERM4.12 | length 6988.6
  TOP w25: v1(1184,558) 1184,495 1210,469 v1(1733,469) ; v1(4832,66) 4832,102 4776,158 4776,278 4813,315 4964,315 5033,384 5033,723.5 5042.5,733 5042.5,802.5 5033,812 5033,1429.65 TERM4.12
  BOTTOM w25: C39.1 635.91,766 880,766 ; C48.1 823.43,1081 883,1081 909,1055 909,795 880,766 ; v1(1184,558) 976,766 880,766 ; v1(1733,469) 2119,83 2742,83 2759,66 v1(4832,66)
GND: C3.1 C13.1 C14.1 C15.1 C17.1 C29.1 C30.1 C31.1 C33.1 C43.1 C44.1 C45.1 D1.2 MH1.MH MH2.MH MH3.MH MH4.MH R4.1 R5.1 R14.1 R15.1 R16.1 R17.1 R18.1 R19.1 R20.1 R21.1 R30.1 R31.1 R32.1 R33.1 R34.1 R35.1 R36.1 R37.1 R44.1 R45.1 R46.1 R47.1 R48.1 R49.1 TERM1.2 TERM2.1 TERM2.2 | length 22717.6
  TOP w25: MH2.MH 250,501 142,609 142,1099 182,1139 393.98,1139 C3.1 393.98,1205 436.63,1247.65 R5.1 ; v1(683,609) 701.37,627.37 R4.1 ; C13.1 C13.1@1381.35,1199 ; v1(1381.35,1376) C13.1@1381.35,1199 ; R15.1 1424.65,1242.31 C13.1@1381.35,1199 ; v1(1546,654) 1591,609 1652.68,609 1697.02,653.35 R14.1 ; v1(1922,1572) 2198,1296 2380,1296 ; v1(2360,1241) 2360,1275 2369.37,1284.37 ; C14.1 2369.37,1284.37 ; R17.1 2381,1296 ; v1(2673,717) 2679.76,723.76 v1@2679.76,732 ; v1@2673,732 v1@2679.76,732 ; R16.1 v1@2679.76,732 ; v1(3059.21,1370) 3041,1351.79 3041,818 ; v1(3061,838) 3041,818 ; C15.1 3297.72,1201 3335.72,1239 ; v1(3477.37,1239) 3335.72,1239 ; R18.1 3630.11,648.27 3586.84,605 3238,605 v1(3146,697) 3041,802 3041,818 ; C17.1 4369,1187.65 v1(4369,1231) R21.1 4390,1358 4595,1358 ; R20.1 v1(4653.74,645) 4653.74,512.26 4731,435 4865.5,435 4885.5,455 4885.5,1162.5 4773,1275 4678,1275 4595,1358 ; v1(5261,709) 5077.5,500.18 ; C29.1 C29.1@5361.63,1145 ; R30.1 5688.74,553.26 5750,492 MH3.MH 5428,250 D1.2 5068.37,489.79 ; MH4.MH 5405.28,1405.28 R31.1 5405.28,1237.65 5361.63,1194 C29.1@5361.63,1145 ; 2369.37,1284.37 2381,1296 ; 2369.37,1284.37 2369.37,1285.37 2380,1296 ; 2380,1296 2381,1296 ; 3335.72,1239 3341.35,1244.63 R19.1 3341.35,1355 3361.35,1375 3925,1375 4112,1562 4112,1815 4133,1836 4266.23,1836 4287.23,1815 4287.23,1665.77 4595,1358 ; 5068.37,489.79 5077.5,498.92 5077.5,500.18 ; 5068.37,489.79 5077.5,500.18 ; 5077.5,500.18 5077.5,916.2 5068.37,925.33 5068.37,1144.37 5069,1145 C29.1@5361.63,1145
  BOTTOM w25: MH2.MH 270,794.4 R48.1 319.51,635 340.51,614 v1@688,614 ; v1(683,609) v1@688,614 ; v1(1546,654) 1546,361 TERM2.1 TERM2.2 ; C44.1 1580.91,1207 1537.25,1250.65 R47.1 1537.25,1355 ; v1(1922,1572) 1570,1572 1537.25,1539.25 1537.25,1355 ; R44.1 2224.23,653.65 2265.48,612.4 2568.4,612.4 v1(2673,717) ; v1(2360,1241) 2490,1241 ; C43.1 2545.34,1198 2490,1241 ; v1@2673,732 2729,788 3011,788 v1(3061,838) ; v1(3059.21,1370) 3105.81,1416.6 3118.6,1416.6 ; v1(3146,697) 3199.63,750.63 R36.1 ; C33.1 3520.74,1200 v1(3477.37,1239) R37.1 3477.37,1340.63 ; R34.1 4225.2,650.8 4270,606 4614.74,606 v1(4653.74,645) ; v1(4369,1231) 4481.94,1231 4505.94,1255 ; R35.1 4505.94,1255 ; C31.1 4549.59,1194 4505.94,1237.65 4505.94,1255 ; v1(5261,709) 5263.74,711.74 R32.1 ; C30.1 5580.85,1194 5536.5,1238.35 R33.1 5536.5,1536.5 MH4.MH ; v1@688,614 874.15,614 TERM2.2 ; TERM2.2 1238.15,510 1256.63,528.48 R46.1 1256.63,792 1224,792 866,1150 635.91,1150 C45.1 635.91,1211 592.25,1254.65 R49.1 617,1304.59 688.41,1376 v1(1381.35,1376) 1516.25,1376 1537.25,1355 ; 2490,1241 2501.68,1252.68 R45.1 ; 2490,1241 R45.1 ; R45.1 2584,1294 2642,1352 3054,1352 3118.6,1416.6 ; 3118.6,1416.6 3401.4,1416.6 ; 3401.4,1416.6 3477.37,1340.63 ; 3401.4,1416.6 3428.77,1416.6 3477.37,1368 3477.37,1340.63
MCU_1: C2.2 R*1.2 TERM3.1 TERM5.1 | length 5692.1
  TOP w25: R*1.2 701.37,1105 700.77,1105.6 C2.2 700.77,1642.23 TERM3.1 640,1827 837,1827 907,1757 907,654 1203,358 1598,358 1906,50 3837,50 TERM5.1
MCU_2: C9.2 R*2.2 TERM3.3 TERM5.2 | length 4284.1
  TOP w25: TERM3.3 1036.7,1830 1230,1830 1256,1804 1256,1640 1422,1474 1670,1474 1696.8,1447.2 C9.2 ; R*2.2 1697.02,1100 1696.8,1100.22 C9.2 ; TERM5.2 3732.15,142 2245,142 2182,205 2182,666 1769,1079 1769,1115 1736,1148 C9.2
MCU_3: C10.2 R*3.2 TERM3.5 TERM5.3 | length 3596.7
  TOP w25: v1(2629.83,1827) 2679.83,1777 C10.2 2679.83,1100.06 2679.76,1100 R*3.2 2750,1053 2774.5,1028.5 2774.5,834.5 2801,808 v1(2801,674)
  BOTTOM w25: TERM3.5 1462.27,1861.87 2594.95,1861.87 v1(2629.83,1827) ; v1(2801,674) 3003,472 3403.3,472 TERM5.3
MCU_4: C11.2 R*4.2 TERM3.7 TERM5.4 | length 4389.9
  TOP w25: TERM5.4 3725.11,528.66 3725.11,638.33 3715.17,648.27 3715.17,1005.83 3670,1051 R*4.2 3630.11,1097 3625.17,1101.94 C11.2
  BOTTOM w25: TERM3.7 1856.1,1668 1998,1668 2025,1641 2025,444 2178,291 2178,195 2198,175 2719,175 2739,195 2739,335 2760,356 3322.45,356 TERM5.4
MCU_5: C12.2 R*5.2 TERM3.9 TERM5.5 | length 5320.2
  TOP w25: v1(2947,1689) 2970.5,1665.5 2970.5,218.5 3010,179 3178.6,179 TERM5.5 ; R*5.2 4653.74,1098 4653.24,1098.5 C12.2 4775,1144 4830,1089 v1(4830,491)
  BOTTOM w25: TERM3.9 2311.8,1606 2864,1606 v1(2947,1689) ; TERM5.5 3302.6,179 4518,179 v1(4830,491)
MCU_6: C25.2 R*6.2 TERM3.11 TERM5.6 | length 6478.6
  TOP w25: TERM3.11 2546.5,1811 2610,1874.5 2859.5,1874.5 3005.5,1728.5 3005.5,279.25 TERM5.6 ; C25.2 5688.8,1096.06 5688.74,1096 R*6.2 5777,1048.69 5800,1025.69 5800,520 v1(5793,513)
  BOTTOM w25: TERM5.6 2966.75,318 2808,318 2785,295 2785,131 2810,106 4776.92,106 5183.92,513 v1(5793,513)
MCU_7: C26.2 R*7.2 TERM4.1 TERM5.7 | length 4749.7
  TOP w25: TERM5.7 2900.5,294.6 2900.5,835.5 2861,875 2861,1423 v1(2885.84,1447.84) ; v1(4985,571) v1(4985,770.32)
  BOTTOM w25: TERM5.7 2944.9,143 4557,143 v1(4985,571) ; v1(2885.84,1447.84) TERM4.1 ; v1(4985,770.32) 5263.68,1049 R*7.2 ; C26.2 5263.68,1097 R*7.2 ; R*7.2 R*7.2
MCU_8: C27.2 R*8.2 TERM4.3 TERM5.8 | length 3382.9
  TOP w25: TERM5.8 2865.5,456.45 2865.5,814.5 2826,854 v1(2826,1500)
  BOTTOM w25: v1(2826,1500) 3152.87,1826.87 3534.83,1826.87 TERM4.3 3993.83,1367.87 4192.27,1367.87 4225.13,1335 C27.2 4225.13,1100.06 4225.2,1100 R*8.2
MCU_9: C28.2 R*9.2 TERM4.5 TERM5.9 | length 3273.6
  TOP w25: TERM5.9 2515.2,179 2873,179 2935.5,241.5 2935.5,1218.5 v1(2909,1245) ; v1(3173.07,1286) 3173.07,1519.07 3241,1587 3812.4,1587 TERM4.5
  BOTTOM w25: v1(2909,1245) 3005.4,1148.6 C28.2 ; v1(3173.07,1286) 3199.57,1259.51 C28.2 ; R*9.2 3199.35,1101 3199.57,1101.22 C28.2
MCU_10: C40.2 R*10.2 TERM4.7 TERM5.10 | length 4629.7
  TOP w25: v1(2224.17,1204.83) 2204.67,1204.83 1874.5,1535 1874.5,1895.5 1933.5,1954.5 4369.6,1954.5 4384.1,1940 TERM4.7
  BOTTOM w25: v1(2224.17,1204.83) C40.2 2224.17,1100.06 2224.23,1100 R*10.2 2190,1054.4 2139.17,1003.57 2139.17,415 2256.35,297.82 TERM5.10
MCU_11: C41.2 R*11.2 TERM4.9 TERM5.11 | length 6324.9
  TOP w25: v1(1051,1069) 1051,755 1120,719.5 1300.5,539 1761.5,539 TERM5.11 2200.5,100 3780,100 3959,279 3959,335 4012,388 4894,388 4921,415 4921,1621.8 TERM4.9
  BOTTOM w25: v1(1051,1069) 1190.4,1069 R*11.2 1257.51,1108 1257.45,1108.06 C41.2
MCU_12: C42.2 R*12.2 TERM4.11 TERM5.12 | length 8614
  BOTTOM w25: TERM5.12 1719.65,98 130,98 102,126 102,985 186.4,1069.4 R*12.2 319.51,1115 319.45,1115.06 C42.2 319.45,1495 394.45,1570 812,1570 837,1595 837,1790 1014,1967 4969.5,1967 TERM4.11
NetD1_1: D1.1 R1.1 | length 84.3
  TOP w25: R1.1 D1.1
VCC: R1.2 R2.2 R3.2 R6.2 R7.2 R8.2 R9.2 R10.2 R11.2 R12.2 R13.2 R22.2 R23.2 R24.2 R25.2 R26.2 R27.2 R28.2 R29.2 R38.2 R39.2 R40.2 R41.2 R42.2 R43.2 TERM1.1 | length 10119
  TOP w25: v1(247,872) 408,872 462,818 462,628.59 529.59,561 715.14,561 752,597.86 752,883 701.65,933.35 R3.2 ; v1(1110,1021) 1110,776.5 1210.28,756.5 1392.78,574 1687,574 1748,635 1748,945 R7.2 ; R8.2 2710,873 2730,853 ; R9.2 2710,961.6 2730,941.6 2730,853 ; v1(2730,666) v1@2730,745.92 ; v1(2743.92,732) v1@2730,745.92 ; R11.2 R10.2 3670,868 3680.17,857.83 3680.17,604.17 v1(3677,601) ; R13.2 R12.2 4690,863 4713,840 v1(4713,598) v1@4730,615 ; R23.2 R22.2 5730,861.69 5752,839.69 v1(5752,740) ; v1@2730,745.92 2730,853
  BOTTOM w25: v1(247,872) 259.4,884.4 R42.2 R43.2 ; v1(1110,1021) 1162.6,968.4 R41.2 1256.51,924.12 1256.63,924 R40.2 ; R39.2 R38.2 2187.57,868.4 2174.17,855 2174.17,635 2231.77,577.4 2641.4,577.4 v1(2730,666) ; v1(2743.92,732) 2813,732 2936,609 3149,609 ; R29.2 R28.2 3170,873.6 3050,753.6 3050,708 3149,609 ; v1(3677,601) v1@3685,609 ; v1(4713,598) 4667,598 4639,570 4200,570 4175,595 4175,845 4200,870 R26.2 R27.2 4035.54,959.54 v1@3685,609 ; v1@4730,615 4944,615 5192.4,863.4 5232.4,863.4 ; R25.2 R24.2 5232.4,863.4 ; v1(5752,740) 5609,597 5250,597 5213,634 5213,844 5232.4,863.4 ; 3149,609 3677,609 v1@3685,609
pads on no net: FID1.1 FID2.1 FID3.1 FID4.1 FID5.1 FID6.1

## Polygon pours and split planes (outlines as drawn)
GND on BOTTOM "GND_BOTTOM" (solid, remove dead copper, pour order 0): 0,0 0,2000 6000,2000 6000,0
VCC on TOP "VCC_TOP" (solid, remove dead copper, pour order 1): 0,0 0,2000 6000,2000 6000,0

## Silkscreen, mask and mechanical layers (free items; w line width, h text height)
Top Overlay:
  lines w10: 875,1455 875,1469 ; 875,1485.55 875,1499.55 ; 875,1515.55 875,1529.55 ; 875,1545.55 875,1559.55 ; 875,1576.55 875,1590.55 ; 1275,1455 1275,1469 ; 1275,1485.55 1275,1499.55 ; 1275,1515.55 1275,1529.55 ; 1275,1545.55 1275,1559.55 ; 1275,1576.55 1275,1590.55 ; 1675,1455 1675,1469 ; 1675,1485.55 1675,1499.55 ; 1675,1515.55 1675,1529.55 ; 1675,1545.55 1675,1559.55 ; 1675,1576.55 1675,1590.55 ; 2062,1455 2062,1469 ; 2062,1485.55 2062,1499.55 ; 2062,1515.55 2062,1529.55 ; 2062,1545.55 2062,1559.55 ; 2062,1576.55 2062,1590.55 ; 2455,1455 2455,1469 ; 2455,1485.55 2455,1499.55 ; 2455,1515.55 2455,1529.55 ; 2455,1545.55 2455,1559.55 ; 2455,1576.55 2455,1590.55 ; 3500,1455 3500,1469 ; 3500,1485.55 3500,1499.55 ; 3500,1515.55 3500,1529.55 ; 3500,1545.55 3500,1559.55 ; 3500,1576.55 3500,1590.55 ; 3900,1455 3900,1469 ; 3900,1485.55 3900,1499.55 ; 3900,1515.55 3900,1529.55 ; 3900,1545.55 3900,1559.55 ; 3900,1576.55 3900,1590.55 ; 4295,1455 4295,1469 ; 4295,1485.55 4295,1499.55 ; 4295,1515.55 4295,1529.55 ; 4295,1545.55 4295,1559.55 ; 4295,1576.55 4295,1590.55 ; 4685,1455 4685,1469 ; 4685,1485.55 4685,1499.55 ; 4685,1515.55 4685,1529.55 ; 4685,1545.55 4685,1559.55 ; 4685,1576.55 4685,1590.55 ; 5085,1455 5085,1469 ; 5085,1485.55 5085,1499.55 ; 5085,1515.55 5085,1529.55 ; 5085,1545.55 5085,1559.55 ; 5085,1576.55 5085,1590.55 ; 163,558 831,558 831,1437 163,1437 163,558 ; 1134.37,554 1134.37,1435 1841.37,1435 1841.37,554 1134.37,554 ; 2111.09,557 2111.09,1434 2817.09,1434 2817.09,557 2111.09,557 ; 3050.74,550 3050.74,1433.25 3772.74,1433.25 3772.74,550 3050.74,550 ; 4083.37,547 4083.37,1433.25 4797.37,1433.25 4797.37,547 4083.37,547 ; 4765,153 4765,353 5131,353 5131,153 4765,153 ; 5113.37,544.69 5833.37,544.69 5833.37,1433 5113.37,1433 5113.37,544.69
  text "L1" at 815,1540 h30
  text "L2" at 895,1540 h30
  text "L10" at 4590,1540 h30
  text "L11" at 5005,1540 h30
  text "L12" at 5105,1540 h30
  text "L8" at 3830.53,1539.45 h30
  text "L9" at 3920.53,1539.45 h30
  text "L9" at 4225.53,1539 h30
  text "L10" at 4315.53,1539 h30
  text "L11" at 4705,1539.45 h30
  text "L2" at 1205,1534.45 h30
  text "L3" at 1295,1534.45 h30
  text "L3" at 1605,1534.45 h30
  text "L4" at 1695,1534.45 h30
  text "L4" at 1995,1534.45 h30
  text "L5" at 2085,1534.45 h30
  text "L5" at 2387.68,1534.45 h30
  text "L6" at 2477.68,1534.45 h30
  text "L7" at 3430.53,1534.45 h30
  text "L8" at 3520.53,1534.45 h30
  text "#1" at 175,1390 h30
  text "#3" at 2128.39,1390 h30
  text "#5" at 4095,1390 h30
  text "#4" at 3065,1387.43 h30
  text "#6" at 5127.37,1387.43 h30
  text "#2" at 1155,1385 h30
  text "GND" at 575,456 h30
  text "VCC" at 774.85,455 h30
  text "GND" at 1195,455 h30
  text "GND" at 1395,455 h30
  text "Power LED" at 4760,368 h30
Bottom Overlay:
  lines w10: 150.88,572.4 932.88,572.4 932.88,1435 150.88,1435 150.88,572.4 ; 1107,558.4 1855.88,558.4 1855.88,1421 1107,1421 1107,558.4 ; 2061.6,557.4 2848.6,557.4 2848.6,1412 2061.6,1412 2061.6,557.4 ; 3060,554 3772,554 3772,1412 3060,1412 3060,554 ; 4081.57,550 4793.57,550 4793.57,1412 4081.57,1412 4081.57,550 ; 5122.11,544.4 5830.11,544.4 5830.11,1412 5122.11,1412 5122.11,544.4
  text "#12" at 915,1390 h30
  text "#11" at 1839.88,1374 h30
  text "#10" at 2833,1365 h30
  text "#9" at 3755,1365 h30
  text "#8" at 4777.8,1365 h30
  text "#7" at 5815,1365 h30
Mechanical 4:
  lines w10: 0,0 1500,0 1500,1500 0,1500 0,0
Mechanical 8:
  the board outline again, w25
Drill Drawing:
  circle w10: c7687.62,-791.17 r33.33
  lines w10: 7654.29,-657.83 7670.96,-657.83 7670.96,-674.5 7704.29,-674.5 7704.29,-657.83 7720.96,-657.83 7720.96,-624.5 7704.29,-624.5 7704.29,-607.83 7670.96,-607.83 7670.96,-624.5 7654.29,-624.5 7654.29,-657.83 ; 7654.29,-524.5 7720.96,-524.5 7720.96,-457.83 7654.29,-457.83 7654.29,-524.5
  lines w15: 7594.5,-869.5 12889.08,-869.5 ; 7594.5,-419.5 12889.08,-419.5 ; 8145.38,-1019.5 8145.38,-269.5 ; 8685.24,-1019.5 8685.24,-269.5 ; 9824.9,-1019.5 9824.9,-269.5 ; 10330.78,-1019.5 10330.78,-269.5 ; 11064.58,-1019.5 11064.58,-269.5 ; 12254.24,-1019.5 12254.24,-269.5 ; 7594.5,-1019.5 12889.08,-1019.5 12889.08,-269.5 7594.5,-269.5 7594.5,-1019.5
  lines w25: 7598.65,1755.07 14679.79,1755.07 ; 7605.5,586.68 14675.09,586.68 ; 7605.85,1193.31 14672.74,1193.31 ; 10215.42,600.79 10215.42,1193.31 ; 10215.42,1760.79 10215.42,2314 ; 11235.42,1200.21 11235.42,1753.42 ; 12306.42,591.27 12306.42,1183.79 ; 7597,64 14680.69,64 14680.69,2314 7597,2314 7597,64
  text "FABRICATION NOTES: /  / 01. BOARD THICKNESS IS 0.062 IN. +/- 10% / 02. WARP & TWIST SHALL NOT EXCEED 1% / 03. ENIG FINISH / 04. SOLDERMASK SHALL BE BLUE LOW GLOSS WITH WHITE EPOXY SILKSCREEN / 05. ROHS LOGO SHALL BE PLACED IN SILK ON BOTTOM / 06. LEAD FREE LOGO TO BE PLACED IN SILK ON BOTTOM / 07. FAB HOUSE TO UPDATE SILKSCREEN FOR MANUFACTURE DATE / 08. FAB HOUSE TO INCREMENT SERIAL NUMBER IN SILK, STARTING AT 00, FOR EACH BOARD / 09. SMALLEST TRACE IS 25 MIL / 10. SMALLEST DRILL IS 28 MIL / 11. COPPER WEIGHT IS 2 OZ. INNER & OUTER / 12. 100% ELECTRICAL TEST FOR OPENS & SHORTS / 13. FINAL FINISH WILL HAVE NO NICKS OR CHIPS IN SOLDERMASK" at 7592,2413 h100
  text "Detector Circuit" at 11917,1964 h100
  text "Project Name:" at 10325.89,1960.01 h100
  text "Project #:" at 7761.1,1957.34 h100
  text "N/A" at 8967,1954 h100
  text "Company: N/A" at 11483.42,1407.79 h100
  text "Nathan A. Schram" at 8987,1404 h100
  text "Designer:" at 7770.04,1394.34 h100
  text "Cage Code:" at 12762.93,827.33 h100
  text "N/A" at 13894.42,817.83 h100
  text "Date:" at 10455.43,810.29 h100
  text "REV #:" at 7783.93,799.87 h100
  text "1.0" at 8495.42,799.6 h100
  text "2018-FEB-03" at 10997,799.87 h100
  text "Notes:" at 7780.23,321.88 h100
  text "Symbol" at 7684.5,-374.5 h72
  text "Count" at 8190.38,-374.5 h72
  text "Hole Size" at 8730.24,-374.5 h72
  text "Plated" at 9869.9,-374.5 h72
  text "Hole Type" at 10375.78,-374.5 h72
  text "Drill Layer Pair" at 11109.58,-374.5 h72
  text "Via/Pad" at 12299.24,-374.5 h72
  text "41" at 8190.38,-524.5 h60
  text "28.00mil (0.711mm)" at 8730.24,-524.5 h60
  text "PTH" at 9869.9,-524.5 h60
  text "Round" at 10375.78,-524.5 h60
  text "TOP - BOTTOM" at 11109.58,-524.5 h60
  text "Via" at 12299.24,-524.5 h60
  text "40" at 8190.38,-674.5 h60
  text "55.12mil (1.400mm)" at 8730.24,-674.5 h60
  text "PTH" at 9869.9,-674.5 h60
  text "Round" at 10375.78,-674.5 h60
  text "TOP - BOTTOM" at 11109.58,-674.5 h60
  text "Pad" at 12299.24,-674.5 h60
  text "4" at 8190.38,-824.5 h60
  text "150.00mil (3.810mm)" at 8730.24,-824.5 h60
  text "PTH" at 9869.9,-824.5 h60
  text "Round" at 10375.78,-824.5 h60
  text "TOP - BOTTOM" at 11109.58,-824.5 h60
  text "Pad" at 12299.24,-824.5 h60
  text "85 Total" at 8190.38,-974.5 h60

## Dimensions
250,1750 to 250,250 on Drill Drawing
250,250 to 5750,250 on Drill Drawing
0,2000 to 0,0 on Drill Drawing
0,0 to 6000,0 on Drill Drawing

## Text inside footprints (layer, text, board x,y; h text height)
Q1: Top Overlay "B" at 542.28,863.6 h30 r90; Top Overlay "E" at 542.28,1056.6 h30 r90; Top Overlay "C" at 379.28,1012.6 h30 r90
Q2: Top Overlay "B" at 1530.65,853.6 h30 r90; Top Overlay "E" at 1530.65,1046.6 h30 r90; Top Overlay "C" at 1367.65,1002.6 h30 r90
Q3: Top Overlay "B" at 2518.68,855.6 h30 r90; Top Overlay "E" at 2518.68,1048.6 h30 r90; Top Overlay "C" at 2355.68,1004.6 h30 r90
Q4: Top Overlay "B" at 3446.02,853.6 h30 r90; Top Overlay "E" at 3446.02,1046.6 h30 r90; Top Overlay "C" at 3283.02,1002.6 h30 r90
Q5: Top Overlay "B" at 4474.96,850.69 h30 r90; Top Overlay "E" at 4474.96,1043.69 h30 r90; Top Overlay "C" at 4311.96,999.69 h30 r90
Q6: Top Overlay "B" at 5510.65,848.28 h30 r90; Top Overlay "E" at 5510.65,1041.28 h30 r90; Top Overlay "C" at 5347.65,997.28 h30 r90
Q7: Bottom Overlay "B" at 5431.83,850 h30 r270; Bottom Overlay "E" at 5431.83,1043 h30 r270; Bottom Overlay "C" at 5594.83,999 h30 r270
Q8: Bottom Overlay "B" at 4400.28,853.6 h30 r270; Bottom Overlay "E" at 4400.28,1046.6 h30 r270; Bottom Overlay "C" at 4563.28,1002.6 h30 r270
Q9: Bottom Overlay "B" at 3371.72,858.6 h30 r270; Bottom Overlay "E" at 3371.72,1051.6 h30 r270; Bottom Overlay "C" at 3534.72,1007.6 h30 r270
Q10: Bottom Overlay "B" at 2396.31,852 h30 r270; Bottom Overlay "E" at 2396.31,1045 h30 r270; Bottom Overlay "C" at 2559.31,1001 h30 r270
Q11: Bottom Overlay "B" at 1431.88,861.4 h30 r270; Bottom Overlay "E" at 1431.88,1054.4 h30 r270; Bottom Overlay "C" at 1594.88,1010.4 h30 r270
Q12: Bottom Overlay "B" at 486.88,867.4 h30 r270; Bottom Overlay "E" at 486.88,1060.4 h30 r270; Bottom Overlay "C" at 649.88,1016.4 h30 r270
TERM1: Top Overlay "1" at 945,232 h30; Top Overlay "2" at 460,232 h30; Mechanical 2 "Terminal Opening" at 255.87,-53.15 h60
TERM2: Top Overlay "1" at 1573.38,232 h30; Top Overlay "2" at 1083.38,232 h30; Mechanical 2 "Terminal Opening" at 880.87,-53.15 h60
TERM3: Top Overlay "1" at 426,1758 h30; Top Overlay "12" at 2883.72,1760.72 h30; Mechanical 2 "Terminal Opening" at 2141.98,1913.62 h60 r180
TERM4: Top Overlay "1" at 3029,1819 h30; Top Overlay "12" at 5512,1763 h30; Mechanical 2 "Terminal Opening" at 4766.98,1913.62 h60 r180
TERM5: Top Overlay "1" at 4190,227 h30; Top Overlay "12" at 1657,214 h30; Mechanical 2 "Terminal Opening" at 2464.02,92.38 h60